# Altium PCB PCB v2.PcbDoc
Units mil, origin at the board's own origin, x right, y up, seen from the top; angles counter-clockwise.
Board outline 7677.17 x 3937.01 mil, 2 copper layers (Top Layer, Bottom Layer); 84 components, 61 nets, 277 pads, 36 vias.
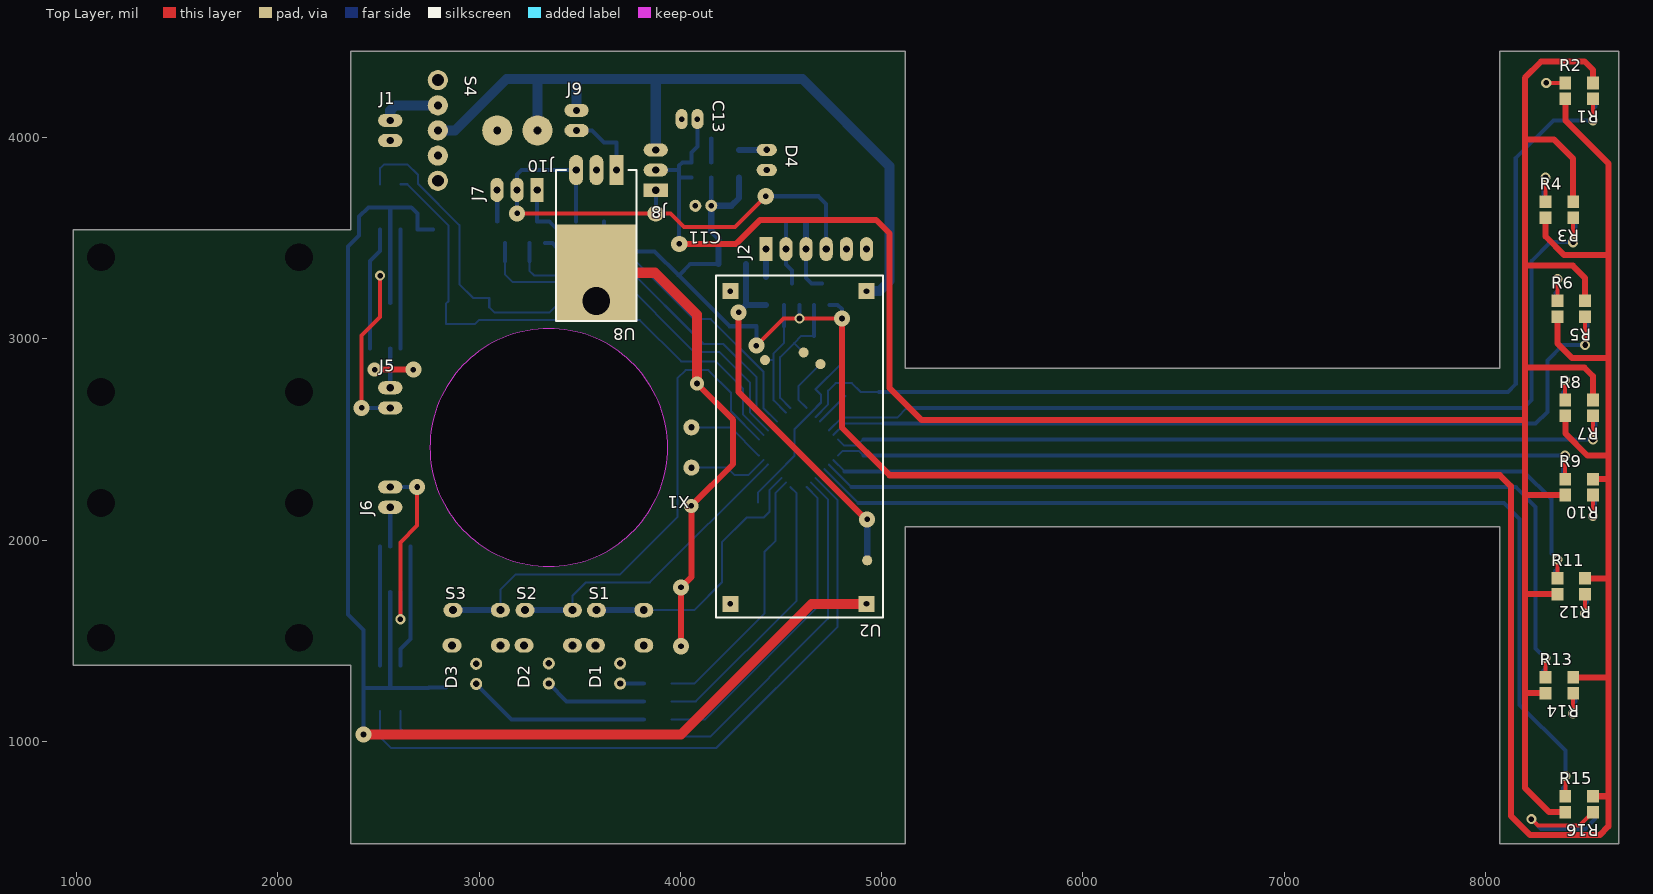
[diagram p0: Top Layer view]
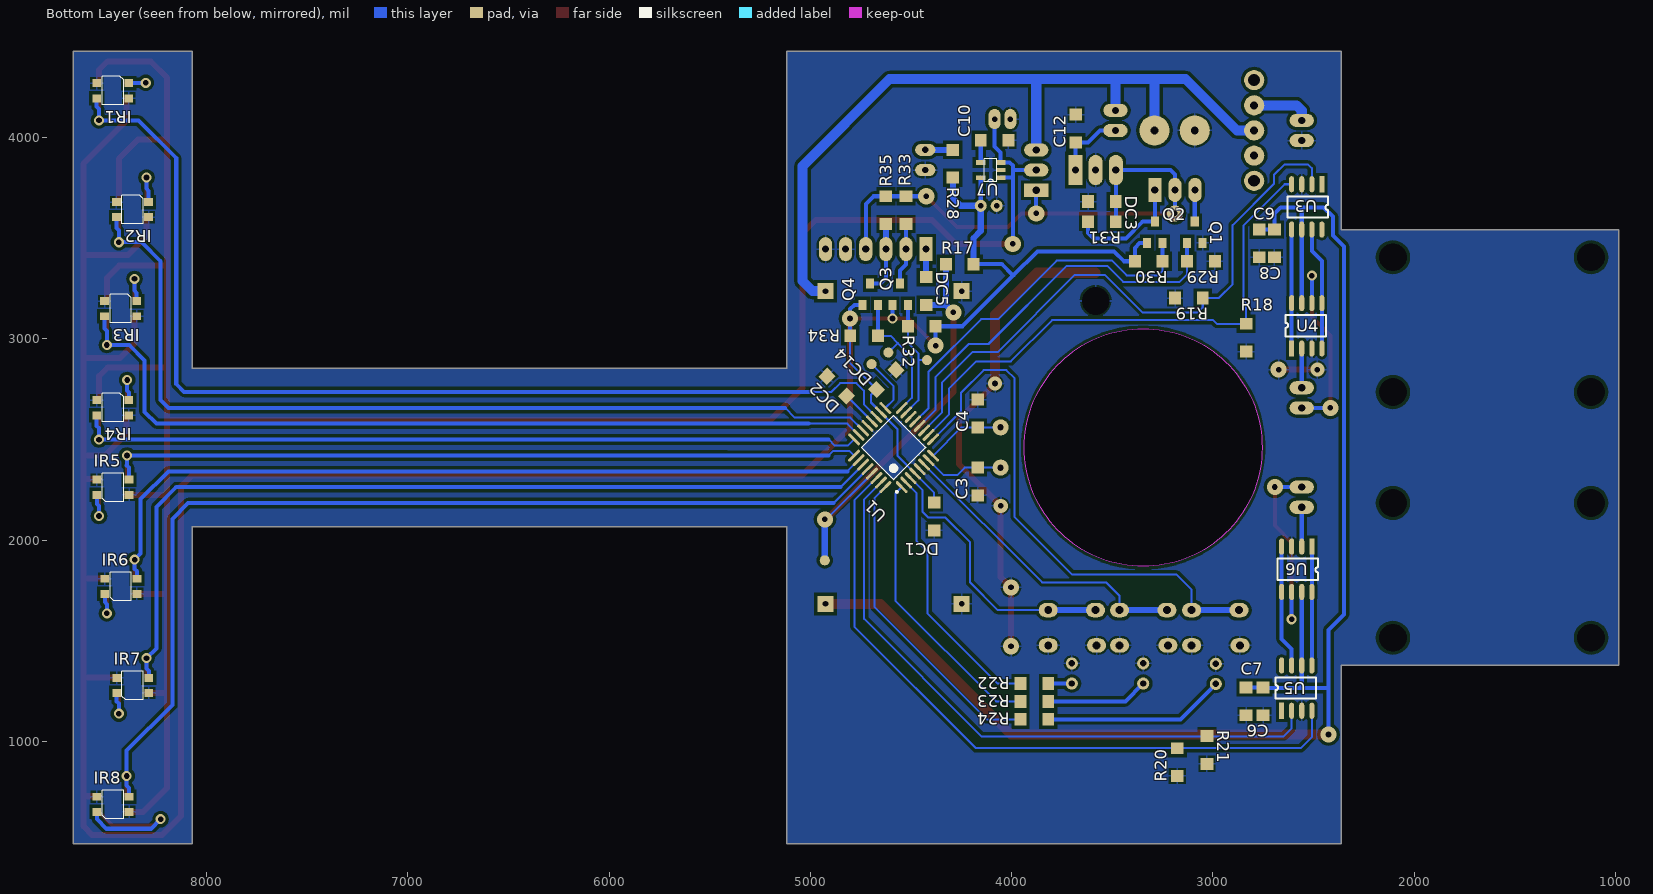
[diagram p1: Bottom Layer view, seen from below]

## Layer stack, top to bottom
Top Solder: solder mask 0.4, Solder Resist, Dk 3.5
Top Layer: signal copper 1.4
Dielectric 1: dielectric 12.6, FR-4, Dk 4.8
Bottom Layer: signal copper 1.4
Bottom Solder: solder mask 0.4, Solder Resist, Dk 3.5

## Board outline
2362.2,492.13 2362.2,1377.95 984.25,1377.95 984.25,3543.31 2362.2,3543.31 2362.2,4429.13 5118.11,4429.13 5118.11,2854.33 8070.87,2854.33 8070.87,4429.13 8661.42,4429.13 8661.42,492.13 8070.87,492.13 8070.87,2066.93 5118.11,2066.93 5118.11,492.13
cut-out: 2755.91,2460.63 ccw(c3346.46,2460.63) 3346.46,1870.08 ccw(c3346.46,2460.63) 3937.01,2460.63 ccw(c3346.46,2460.63) 3346.46,3051.18 ccw(c3346.46,2460.63)

## Design rules (kind name [scope] priority, off if disabled: settings)
Clearance [All] p1: gap=15
HoleSize [All] p1: absolutevalues=TRUE maxlimit=13779.53 minlimit=0.98 maxpercent=80.000 minpercent=20.000
PolygonConnect [All] p1: connectstyle=Relief reliefconductorwidth=10 reliefentries=4 polygonreliefangle="90 Angle" airgapwidth=10
RoutingVias [All] p1: holewidth=28 width=50 viastyle="Through Hole" minholewidth=28 minwidth=50 maxholewidth=28 maxwidth=80
SolderMaskExpansion [All] p1: expansion=4
Width [All] p1: maxlimit=50 minlimit=10 preferedwidth=20
29 further rules are at their usual default settings.

## Classes and differential pairs
component class Sensors: IR1 IR2 IR3 IR4 IR5 IR6 IR7 IR8 R1 R2 R3 R4 R5 R6 R7 R8 R9 R10 R11 R12 R13 R14 R15 R16
component class Power: C10 C11 C12 C13 D4 DC3 J1 J8 J9 R28 S4 U7 U8
component class Motors: C6 C7 C8 C9 J5 J6 J7 J10 Q1 Q2 R18 R19 R20 R21 R29 R30 R31 U2 U3 U4 U5 U6
component class Main: C3 C4 D1 D2 D3 DC1 DC2 DC5 DC14 J2 Q3 Q4 R17 R22 R23 R24 R32 R33 R34 R35 S1 S2 S3 U1 X1

## Components (designator, comment, footprint, x,y, rotation, side; value= is the part's Value field where it differs from the comment)
C3 "CAP-CER" C1206 4167.72,2291.73 r90 bottom
C4 "CAP-CER" C1206 4167.72,2629.53 r270 bottom
C6 "CAP-CER" C1206 2751.18,1199.61 r90 bottom
C7 "CAP-CER" C1206 2835.83,1199.61 r90 bottom
C8 "CAP-CER" C1206 2694.49,3474.41 r90 bottom
C9 "CAP-CER" C1206 2770.87,3474.41 r90 bottom
C10 "CAP-CER" C1206 4084.65,3987.01 r0 bottom
C11 "CAP-ELEC" CAP-ELEC-5x11x2mm#1 4114.17,3661.42 r180 top
C12 "CAP-CER" C1206 3681.1,4045.28 r90 bottom
C13 "CAP-ELEC" CAP-ELEC-5x11x2mm#2 4045.67,4092.13 r180 top
D1 "LED" LED-3MM-YELLOW 3700.79,1338.19 r90 top
D2 "LED" LED-3MM-YELLOW 3346.46,1338.19 r90 top
D3 "LED" LED-3MM-YELLOW 2985.85,1336.37 r90 top
D4 "LED" LED-3MM-RED 4429.14,3888.97 r270 top
DC1 "CAP-CER" C1206 4385.04,2118.11 r270 bottom
DC2 "CAP-CER" C1206 4868.4,2765.65 r45 bottom
DC3 "CAP-CER" C1206 3551.57,3682.28 r180 bottom
DC5 "CAP-CER" C1206 4424.61,3238.19 r90 bottom
DC14 "CAP-CER" C1206 4622.54,2797.93 r315 bottom
IR1 "QRE1113GR" QRE1113GR 8464.57,4232.28 r0 bottom
IR2 "QRE1113GR" QRE1113GR 8366.14,3641.73 r0 bottom
IR3 "QRE1113GR" QRE1113GR 8425.2,3149.61 r0 bottom
IR4 "QRE1113GR" QRE1113GR 8464.57,2657.48 r0 bottom
IR5 "QRE1113GR" QRE1113GR 8464.57,2263.78 r180 bottom
IR6 "QRE1113GR" QRE1113GR 8425.2,1771.65 r180 bottom
IR7 "QRE1113GR" QRE1113GR 8366.14,1279.53 r180 bottom
IR8 "QRE1113GR" QRE1113GR 8464.57,688.98 r180 bottom
J1 "BAT" "HEADER 1x2" 2559.06,4035.43 r0 top
J2 "UART" "Header 1x6" 4424.61,3446.06 r90 top
J5 "MOT IZQ" "HEADER 1x2" 2559.06,2707.48 r0 top
J6 "MOT DER" "HEADER 1x2" 2559.06,2213.78 r180 top
J7 "ESC SIGNAL" "Header 1x3" 3288.98,3740.16 r270 top
J8 "JUMPER" "Header 1x3" 3877.95,3738.58 r180 top
J9 "JUMPER" JUMPER 3484.25,4085.43 r180 top
J10 "ESC POWER" BLOCK_TERMINAL-2 3190.55,4035.43 r270 top
Q1 "2N7002" SOT-23 3365.55,3602.68 r180 bottom
Q2 "2N7002" SOT-23 3563.98,3602.68 r180 bottom
Q3 "2N7002" SOT-23 4829.33,3295.28 r180 bottom
Q4 "2N7002" SOT-23 4978.15,3295.28 r180 bottom
R1 "RES" R1206 8464.57,4192.91 r180 top
R2 "RES" R1206 8464.57,4271.65 r0 top
R3 "RES" R1206 8366.14,3602.36 r180 top
R4 "RES" R1206 8366.14,3681.1 r0 top
R5 "RES" R1206 8425.2,3110.24 r180 top
R6 "RES" R1206 8425.2,3188.98 r0 top
R7 "RES" R1206 8464.57,2618.11 r180 top
R8 "RES" R1206 8464.57,2696.85 r0 top
R9 "RES" R1206 8464.57,2303.15 r0 top
R10 "RES" R1206 8464.57,2224.41 r180 top
R11 "RES" R1206 8425.2,1811.02 r0 top
R12 "RES" R1206 8425.2,1732.28 r180 top
R13 "RES" R1206 8366.14,1318.9 r0 top
R14 "RES" R1206 8366.14,1240.16 r180 top
R15 "RES" R1206 8464.57,728.35 r0 top
R16 "RES" R1206 8464.57,649.61 r180 top
R17 "RES" R1206 4257.87,3371.26 r180 bottom
R18 "RES" R1206 2835.43,3006.3 r90 bottom
R19 "RES" R1206 3119.69,3203.15 r180 bottom
R20 "RES" R1206 3177.17,898.03 r90 bottom
R21 "RES" R1206 3029.92,958.27 r90 bottom
R22 "RES" R1206 3887.18,1288.19 r0 bottom
R23 "RES" R1206 3887.18,1199.21 r0 bottom
R24 "RES" R1206 3887.18,1110.63 r0 bottom
R28 "RES" R1206 4292.13,3870.08 r270 bottom
R29 "RES" R1206 3059.45,3385.83 r0 bottom
R30 "RES" R1206 3318.9,3385.83 r0 bottom
R31 "RES" R1206 3551.57,3582.68 r180 bottom
R32 "RES" R1206 4446.46,3062.99 r180 bottom
R33 "RES" R1206 4524.61,3639.76 r90 bottom
R34 "RES" R1206 4733.07,3015.35 r0 bottom
R35 "RES" R1206 4624.61,3639.76 r90 bottom
S1 "BUTTON" TACT_SWITCH-SMALL-4PIN 3818.29,1652.85 r180 top
S2 "BUTTON" TACT_SWITCH-SMALL-4PIN 3463.96,1652.85 r180 top
S3 "BUTTON" TACT_SWITCH-SMALL-4PIN 3105.85,1652.85 r180 top
S4 "SLIDE-SWITCH" SWITCH 2795.28,4035.43 r270 top
U1 "ATmega328PB-AUR" 32A_M 4586.61,2460.63 r45 bottom
U2 "XL6009 Module" "XL6009 mdl" 4586.61,2460.63 r270 top
U3 "4427" SOIC-8 2459.06,3983.31 r270 bottom
U4 "ZXMHC3F381N8" SOIC-8 2609.06,2737.76 r90 bottom
U5 "4427" SOIC-8 2659.06,937.95 r90 bottom
U6 "ZXMHC3F381N8" SOIC-8 2509.06,2183.5 r270 bottom
U7 "LP2985" SOT-23-5 4104.33,3838.58 r0 bottom
U8 "LM7805" TO-220-FLAT 3682.68,3838.58 r270 top
X1 "XTAL" HC-49/S 4055.12,2460.63 r270 top

## Footprints (in the part's own frame and the unit in brackets; to place one, negate y for a bottom-side part, rotate by r counter-clockwise, add the part's x,y. Pads: shape width x height; smd on the part's side, far side on the other; paste and mask are expansions set on the pad)
32A_M [mm] "Thin QFP, 32-Leads, Body 7x7mm, Pitch 0.8mm, IPC Low Density"
  oval 1.95x0.381 smd: 1(-4.25,2.8) 2(-4.25,2) 3(-4.25,1.2) 4(-4.25,0.4) 5(-4.25,-0.4) 6(-4.25,-1.2) 7(-4.25,-2) 8(-4.25,-2.8) 17(4.25,-2.8) 18(4.25,-2) 19(4.25,-1.2) 20(4.25,-0.4) 21(4.25,0.4) 22(4.25,1.2) 23(4.25,2) 24(4.25,2.8)
  oval 0.381x1.95 smd: 9(-2.8,-4.25) 10(-2,-4.25) 11(-1.2,-4.25) 12(-0.4,-4.25) 13(0.4,-4.25) 14(1.2,-4.25) 15(2,-4.25) 16(2.8,-4.25) 25(2.8,4.25) 26(2,4.25) 27(1.2,4.25) 28(0.4,4.25) 29(-0.4,4.25) 30(-1.2,4.25) 31(-2,4.25) 32(-2.8,4.25)
  silkscreen extent -4.37,-2.85 2.85,3.77, body extent -3.5,-3.5 3.5,3.5, height 1.2
BLOCK_TERMINAL-2 [mm]
  round 3.81 hole 1: 1(0,2.54) 2(0,-2.54)
  body extent -4.57,-5 3.43,5, height 10.16
C1206 [mm]
  rect 1.5x1.6 smd: 1(-1.75,0) 2(1.75,0)
  body extent -1.6,-0.76 1.6,0.84, height 1.26
CAP-ELEC-5x11x2mm#1 [mil]
  round 60 hole 27.56: 1(-39.37,0) 2(39.37,0)
  body extent -100,-99 99,99, height 454
CAP-ELEC-5x11x2mm#2 [mil]
  oval 60x100 hole 27.56: 1(-39.37,0) 2(39.37,0)
  body extent -100,-99 99,99, height 454
HC-49/S [mil]
  round 80 hole 31.5: 1(-100,0) 2(100,0)
  body extent -223,-90 223,93, height 138
"HEADER 1x2" [mil]
  oval 120x65 hole 35.43: 1(0,50) 2(0,-50)
  body extent -49,-100 49,100, height 336
"Header 1x3" [mil]
  rect 120x65 hole 35.43: 1(0,0)
  oval 120x65 hole 35.43: 2(0,-100) 3(0,-200)
  body extent -49,-250 49,50, height 336
"Header 1x6" [mil]
  rect 120x65 hole 35.43: 1(0,0)
  oval 120x65 hole 35.43: 2(0,-100) 3(0,-200) 4(0,-300) 5(0,-400) 6(0,-500)
  body extent -49,-550 49,50, height 336
JUMPER [mil]
  oval 120x65 hole 35.43: 1(0,50) 2(0,-50)
  body extent -49,-100 49,100, height 350
LED-3MM-RED [mil]
  oval 60x100 hole 31.5: A(-50,0) K(50,0)
  body extent -66,-65 64,65, height 217
LED-3MM-YELLOW [mil]
  round 60 hole 31.5: A(-50,0) K(50,0)
  body extent -66,-65 64,65, height 217
QRE1113GR [mm]
  rect 1.1x1 smd: A(-2.01,-0.97) C(2.04,0.94) E(-2.01,0.94) K(2.04,-0.97)
  silkscreen extent -1.35,-1.85 1.35,1.75, body extent -2.4,-1.8 2.4,1.8, height 1.83
R1206 [mm]
  rect 1.5x1.6 smd: 1(-1.75,0) 2(1.75,0)
  body extent -1.6,-0.76 1.6,0.84, height 0.68
SOIC-8 [mil]
  rect 80x25 smd: 1(215,0)
  oval 80x25 smd: 2(215,-50) 3(215,-100) 4(215,-150) 5(440,-150) 6(440,-100) 7(440,-50) 8(440,0)
  silkscreen extent 275,-170 380,30, body extent 212,-171 448,21, height 69
SOT-23 [mil]
  rect 40x50 smd: B(237.2,-125.98) C(275,-20) E(313.98,-125.98)
  body extent 218,-124 333,-27, height 38
SOT-23-5 [mm]
  rect 1.2x0.6 smd: 1(-1.25,0.95) 3(-1.25,-0.95) 4(1.25,-0.95) 5(1.25,0.95)
  rect 1.2x0.5 smd: 2(-1.25,0)
  silkscreen extent -0.8,-1.45 0.8,1.45, body extent -1.4,-1.45 1.4,1.45, height 1.45
SWITCH [mm]
  round 2.54 hole 1: 1(-3.175,0) 2(0,0) 3(3.175,0)
  round 2.54 hole 1.5: 4(-6.35,0) 4(6.35,0)
  body extent -7,-3.1 7,3.1, height 9.65
TACT_SWITCH-SMALL-4PIN [mm]
  oval 2.4x1.8 hole 1: 1(0,4.445) 1(6.096,4.445) 2(0,0) 2(5.969,0)
  body extent -0.94,-0.79 7.04,5.21, height 5.15
TO-220-FLAT [mil]
  rect 150x70 hole 35.43: 1(0,0)
  oval 150x70 hole 35.43: 2(0,-100) 3(0,-200)
  rect 480x400 smd: 2(510,-100)
  round 0 hole 137.8 unplated: 2(650,-100)
  silkscreen extent 0,-300 750,100, body extent -5,-300 755,100, height 195
"XL6009 mdl" [mil]
  rect 80x80 hole 27.56: 0(-777,338) 1(-777,-338) 2(777,-338) 3(777,338)
  silkscreen extent -855,-411 845,419, body extent -850,-415 850,415, height 502

## Part data
J1 J5 J6: library part "Header 1x2"
J2: library part "Header 1x6"
J7 J8: library part "Header 1x3"
J10: library part 2-BLOCK_TERMINAL
Q1 Q2 Q3 Q4: library part N-MOSFET
U1: "8-bit AVR Microcontroller, 32KB Flash, 1KB EEPROM, 2KB SRAM, 32-pin TQFP, Industrial Grade (-40°C to 85°C), Reel"
U8: library part LM78XX

## Free pads (board coordinates)
  round 0 hole 137.8 unplated: 0(2106.3,1515.75) 0(2106.3,2185.04) 0(2106.3,2736.22) 0(2106.3,3405.51) 1(1122.05,1515.75) 1(1122.05,2185.04) 1(1122.05,2736.22) 1(1122.05,3405.51)
  round 50 all layers, no hole: ""(4420.47,2894.88) ""(4612.6,2932.68) ""(4695.67,2874.8) ""(4928.35,1900)

## Via types
v1: diameter 50, hole 28, Top Layer to Bottom Layer, 19 vias
v2: diameter 80, hole 28, Top Layer to Bottom Layer, 14 vias
v3: diameter 70, hole 28, Top Layer to Bottom Layer, 3 vias

## Nets (pads, with @x,y where several pads share a name; then routed paths per layer and width w, separated by ;. In a path a pad name is that pad's centre, name@x,y a point inside that pad or via, vN(x,y) a via of type N, cw(c..) or ccw(c..) an arc to the next point about the centre after c; other vN are vias at no path point)
5V: DC3.2 J2.4 J7.2 J8.1 R31.2 R33.2 R35.2 U8.3 | length 2732.9
  Top Layer w20: v2(3188.98,3623.62) v2(3877.95,3623.62) 3950,3623.62 4017.32,3556.3 4271.65,3556.3 v2(4424.02,3708.66)
  Bottom Layer w20: v2(3188.98,3623.62) J7.2 3188.98,3816.54 3211.02,3838.58 U8.3 DC3.2 R31.2 ; v2(3877.95,3623.62) J8.1 ; v2(4424.02,3708.66) R33.2 R35.2 4685.43,3708.66 4724.61,3669.48 J2.4
BAT: J8.3 J9.2 J10.1 S4.2 U2.0 | length 4000.3
  Bottom Layer w50: S4.2 2880.71,4035.43 3136.61,4291.34 3290.55,4291.34 ; J10.1 3290.55,4291.34 ; J9.2 3484.25,4291.34 ; J8.3 3877.95,4291.34 ; U2.0 4989.6,3237.63 5039.37,3287.4 5039.37,3858.27 4606.3,4291.34 3877.95,4291.34 ; 3290.55,4291.34 3484.25,4291.34 ; 3484.25,4291.34 3877.95,4291.34
BTN1: S1.2 U1.3 | length 1370.1
  Bottom Layer w10: S1.2@3818.29,1652.85 4068.6,1652.85 4205.91,1790.16 4205.91,1989.76 4329.13,2112.99 4413.39,2112.99 4443.31,2142.91 4443.31,2250.51 U1.3
  Bottom Layer w30: S1.2@3583.29,1652.85 S1.2@3818.29,1652.85
BTN2: S2.2 U1.6 | length 1546.5
  Bottom Layer w10: S2.2@3463.96,1652.85 3463.96,1723.01 3531.5,1790.55 3848.49,1790.55 4433.66,2375.72 U1.6
  Bottom Layer w30: S2.2@3228.96,1652.85 S2.2@3463.96,1652.85
BTN3: S3.2 U1.9 | length 2673.4
  Bottom Layer w10: S3.2@3105.85,1652.85 3105.85,1754.27 3182.28,1830.71 3701.18,1830.71 3985.43,2114.96 3985.43,2804.33 4025.98,2844.88 4139.37,2844.88 4251.57,2732.68 4251.57,2639.77 U1.9
  Bottom Layer w30: S3.2@2870.85,1652.85 S3.2@3105.85,1652.85
E_ON: Q1.B R29.2 U1.12 | length 1959.4
  Bottom Layer w10: R29.2 3128.35,3320.47 3165.75,3283.07 3445.67,3283.07 3525.98,3363.39 3726.38,3363.39 4114.96,2974.8 4214.17,2974.8 4377.56,2811.42 4377.56,2647.41 U1.12
  Bottom Layer w20: R29.2 Q1.B
E_PWM: Q2.E R30.1 U1.13 | length 1842.5
  Bottom Layer w10: R30.1 3250,3339.37 3273.23,3316.14 3429.13,3316.14 3501.38,3388.39 3776.57,3388.39 4066.93,3098.03 4151.57,3098.03 4412.99,2836.61 4412.99,2656.52 U1.13
  Bottom Layer w20: R30.1 Q2.E
GND: C3.1 C4.1 C6.1 C7.1 C8.1 C9.1 C10.1 C11.2 C12.2 C13.2 D1.K D2.K D3.K D4.K DC1.2 DC2.2 DC3.1 DC14.1 IR1.E IR1.K IR2.E IR2.K IR3.E IR3.K IR4.E IR4.K IR5.E IR5.K IR6.E IR6.K IR7.E IR7.K IR8.E IR8.K J1.2 J2.5 J2.6 J10.2 Q1.E R18.1 R19.1 R20.1 R21.1 R29.1 S1.1 S2.1 S3.1 U1.5 U1.21 U2.1 U2.2 U3.3 U4.3 U5.3 U6.3 U7.2 U8.2 | length 2612.1
  Top Layer w30: v3(2481.5,2847.64) v2(2674.02,2847.64) ; v2(4003.15,1473.62) 4003.15,1754.72 4008.66,1760.24 v2(4003.15,1765.75) 4054.33,1816.93 v3(4054.33,2170.47) 4262.6,2378.74 4262.6,2598.43 v3(4082.68,2778.35)
  Top Layer w50: U8.2@3582.68,3328.58 3874.57,3328.58 4082.68,3120.47 v3(4082.68,2778.35)
IR1: IR1.C R1.1 U1.19 | length 5427.7
  Top Layer w20: v1(8533.46,4085.43) R1.1
  Bottom Layer w10: U1.19 4734.41,2675.24 4734.41,2743.47 4771.02,2780.08 4851.91,2780.08 4895.77,2736.22 4986.61,2736.22
  Bottom Layer w20: 4986.61,2736.22 8110.24,2736.22 8149.61,2775.59 8149.61,3897.64 8337.4,4085.43 v1(8533.46,4085.43) 8533.46,4142.13 8544.88,4153.54 IR1.C
IR2: IR2.C R3.1 U1.22 | length 4738.7
  Top Layer w20: v1(8435.04,3480.32) R3.1
  Bottom Layer w10: U1.22 4801.54,2608.74 5076.46,2608.74 5125.2,2657.48
  Bottom Layer w20: 5125.2,2657.48 8188.98,2657.48 8228.35,2696.85 8228.35,3385.83 8322.83,3480.32 v1(8435.04,3480.32) 8435.04,3538.58 8446.46,3550 IR2.C
IR3: IR3.C R5.1 U1.23 | length 4356.5
  Top Layer w20: v1(8494.09,2969.68) R5.1
  Bottom Layer w10: U1.23 4816.08,2578.74 5007.87,2578.74
  Bottom Layer w20: 5007.87,2578.74 8248.03,2578.74 8307.09,2637.8 8307.09,2893.7 8383.07,2969.68 v1(8494.09,2969.68) 8494.09,3039.37 8505.51,3050.79 IR3.C
IR4: IR4.C R7.1 U1.24 | length 4019.9
  Top Layer w20: v1(8533.46,2500) R7.1
  Bottom Layer w10: U1.24 4813.8,2470.08 4878.35,2470.08 4909.26,2501 ; 5412.39,2501 5413.39,2500
  Bottom Layer w20: 4909.26,2501 5412.39,2501 ; 5413.39,2500 v1(8533.46,2500) 8533.46,2556.69 8544.88,2568.11 IR4.C
IR5: IR5.C R9.1 U1.25 | length 3880.4
  Top Layer w20: v1(8394.09,2421.26) 8394.09,2321.26 8385.83,2312.99 R9.1
  Bottom Layer w10: U1.25 4806.71,2444.09 4886.22,2444.09 4910.05,2420.26 ; 5412.39,2420.26 5413.39,2421.26
  Bottom Layer w20: 4910.05,2420.26 5412.39,2420.26 ; 5413.39,2421.26 v1(8394.09,2421.26) 8394.09,2374.41 ; IR5.C 8384.25,2360.63 8396.06,2372.44
IR6: IR6.C R11.1 U1.26 | length 4152.2
  Top Layer w20: R11.1 v1(8356.3,1903.94)
  Bottom Layer w10: U1.26 4816.08,2342.52
  Bottom Layer w20: 4816.08,2342.52 8188.98,2342.52 8326.77,2204.72 8326.77,1933.46 v1(8356.3,1903.94) 8356.3,1857.48 8344.88,1846.06 IR6.C
IR7: IR7.C R13.1 U1.27 | length 4566
  Top Layer w20: R13.1 v1(8297.24,1414.17)
  Bottom Layer w10: U1.27 4850.28,2263.78
  Bottom Layer w20: 4850.28,2263.78 8149.61,2263.78 8248.03,2165.35 8248.03,1463.39 v1(8297.24,1414.17) 8297.24,1362.6 8285.83,1351.18 IR7.C
IR8: IR8.C R15.1 U1.28 | length 5134.8
  Top Layer w20: R15.1 v1(8395.67,828.74)
  Bottom Layer w10: U1.28 4884.48,2185.04
  Bottom Layer w20: 4884.48,2185.04 8090.55,2185.04 8169.29,2106.3 8169.29,1181.1 8395.67,954.72 v1(8395.67,828.74) 8395.67,780.71 8384.25,769.29 IR8.C
LED1: R22.2 U1.2 | length 1299.5
  Bottom Layer w10: R22.2 4068.5,1288.19 4418.5,1638.19 4418.5,1944.09 4472.83,1998.43 4472.83,2235.49 U1.2
LED2: R23.2 U1.1 | length 1406.4
  Bottom Layer w10: R23.2 4077.56,1199.21 4577.17,1698.82 4577.17,2233.45 U1.1
LED3: R24.2 U1.32 | length 1575
  Bottom Layer w10: R24.2 4123.23,1110.63 4681.89,1669.29 4681.89,2209.46 U1.32
MD_DIR: R20.2 U1.30 U5.4 | length 3459.5
  Bottom Layer w10: U5.4 2509.06,1022.44 2564.57,966.93 R20.2 4177.17,966.93 4781.5,1571.26 4781.5,2198.93 U1.30
MD_PWM: R21.2 U1.31 U5.2 | length 3180.5
  Bottom Layer w10: U5.2 2609.06,1066.54 2649.21,1026.38 4150,1026.38 4733.07,1609.45 4733.07,2202.82 U1.31
MI_DIR: R19.2 U1.11 U3.2 | length 3028.7
  Bottom Layer w10: U3.2 2509.06,3848.03 2528.35,3867.32 2644.49,3867.32 2696.85,3814.96 2696.85,3770.47 2902.36,3564.96 2902.36,3271.26 2970.47,3203.15 R19.2 3050.79,3157.09 3077.56,3130.32 3349.61,3130.32 3537.01,3317.72 3687.01,3317.72 4070.08,2934.65 4194.88,2934.65 4345.67,2783.86 4345.67,2634.76 U1.11
MI_PWM: R18.2 U1.10 U3.4 | length 2713.6
  Bottom Layer w10: U3.4 2643.5,3768.31 2847.24,3564.57 2847.24,3185.83 2835.43,3174.02 R18.2 2981.1,3075.2 2999.61,3093.7 3798.82,3093.7 4003.54,2888.98 4175.98,2888.98 4311.02,2753.94 4311.02,2624.87 U1.10
NetC10_2: C10.2 U7.4 | length 120.1
  Bottom Layer w20: U7.4 C10.2@4153.54,3996.06
NetC12_1: C12.1 J9.1 U8.1 | length 359.8
  Bottom Layer w20: J9.1 3560.63,4035.43 3619.68,3976.38 C12.1 3682.68,3974.8 U8.1
NetD1_A: D1.A R22.1 | length 117.5
  Bottom Layer w20: D1.A R22.1
NetD2_A: D2.A R23.1 | length 508.7
  Bottom Layer w20: D2.A 3435.43,1199.21 R23.1
NetD3_A: D3.A R24.1 | length 905.2
  Bottom Layer w20: D3.A 3161.58,1110.63 R24.1
NetD4_A: D4.A R28.1 | length 137
  Bottom Layer w30: R28.1 D4.A
NetDC2_1: DC2.1 U1.20 | length 178.7
  Bottom Layer w10: U1.20 DC2.1@4820.16,2716.45
NetDC5_2: DC5.2 J2.1 | length 139
  Bottom Layer w30: DC5.2 J2.1
NetIR1_A: IR1.A R2.1 | length 178.9
  Top Layer w20: v1(8301.18,4272.05) 8395.28,4272.05 R2.1
  Bottom Layer w20: v1(8301.18,4272.05) IR1.A@8385.43,4272.05
NetIR2_A: IR2.A R4.1 | length 246.4
  Top Layer w20: R4.1 v1(8297.24,3801.57)
  Bottom Layer w20: IR2.A 8287.01,3735.83 8297.24,3746.06 v1(8297.24,3801.57)
NetIR3_A: IR3.A R6.1 | length 225
  Top Layer w20: R6.1 8357.09,3189.76 v1(8357.09,3298.43)
  Bottom Layer w20: IR3.A 8346.06,3228.35 8357.09,3239.37 v1(8357.09,3298.43)
NetIR4_A: IR4.A R8.1 | length 204.5
  Top Layer w20: v1(8393.31,2796.06) 8393.31,2700.79 8396.46,2697.64 R8.1
  Bottom Layer w20: IR4.A 8385.43,2735.04 8393.31,2742.91 v1(8393.31,2796.06)
NetIR5_A: IR5.A R10.1 | length 213.3
  Top Layer w20: v1(8533.46,2120.47) R10.1
  Bottom Layer w20: v1(8533.46,2120.47) 8533.46,2170.87 8543.7,2181.1 IR5.A
NetIR6_A: IR6.A R12.1 | length 196.8
  Top Layer w20: v1(8494.09,1636.61) R12.1
  Bottom Layer w20: v1(8494.09,1636.61) 8494.09,1681.89 8504.33,1692.13 IR6.A
NetIR7_A: IR7.A R14.1 | length 208.6
  Top Layer w20: v1(8435.04,1138.58) R14.1
  Bottom Layer w20: v1(8435.04,1138.58) 8435.04,1189.76 8445.28,1200 IR7.A
NetIR8_A: IR8.A R16.1 | length 739.2
  Top Layer w20: v1(8227.17,614.57) 8259.06,582.68 8466.54,582.68 R16.1
  Bottom Layer w20: v1(8227.17,614.57) 8274.8,566.93 8495.67,566.93 8543.7,614.96 IR8.A
NetJ1_1: J1.1 S4.1 | length 296.1
  Bottom Layer w50: J1.1 2559.06,4134.65 2584.84,4160.43 S4.1
NetJ5_1: J5.1 U4.2 | length 195.3
  Bottom Layer w20: J5.1 U4.2
NetJ5_2: J5.2 U4.6 | length 973.4
  Top Layer w20: v2(2416.93,2657.48) 2416.93,3016.14 2509.06,3108.27 v1(2509.06,3314.17)
  Bottom Layer w20: v2(2416.93,2657.48) J5.2 ; U4.6 v1(2509.06,3314.17)
NetJ6_1: J6.1 U6.2 | length 195.3
  Bottom Layer w20: U6.2 J6.1
NetJ6_2: J6.2 U6.6 | length 960.9
  Top Layer w20: v1(2609.06,1607.48) 2609.06,1989.37 2692.52,2072.83 v2(2692.52,2264.17)
  Bottom Layer w20: J6.2 2692.13,2263.78 v2(2692.52,2264.17) ; v1(2609.06,1607.48) U6.6
NetJ7_1: J7.1 Q2.C R31.1 | length 591
  Bottom Layer w20: J7.1 Q2.C 3348.82,3582.68 3431.89,3499.61 3594.09,3499.61 3620.47,3525.98 R31.1
NetJ7_3: J7.3 Q1.C | length 158.1
  Bottom Layer w20: J7.3 3090.55,3738.58 Q1.C
NetU3_5: U3.5 U4.1 U4.8 | length 590.6
  Bottom Layer w20: U4.1 U4.8 U3.5
NetU3_7: U3.7 U4.4 U4.5 | length 611.3
  Bottom Layer w20: U4.4 U4.5 2459.06,3387.01 2509.06,3437.01 U3.7
NetU5_5: U5.5 U6.1 U6.8 | length 590.6
  Bottom Layer w20: U5.5 U6.8 U6.1
NetU5_7: U5.7 U6.4 U6.5 | length 611.3
  Bottom Layer w20: U5.7 2609.06,1459.84 2659.06,1509.84 U6.5 U6.4
RST: DC5.1 pad.@4928.35,1900 R17.1 U1.29 | length 2181.1
  Top Layer w10: 4424.61,2600.36 4424.8,2600.55
  Top Layer w30: v2(4289.37,3131.89) 4289.37,2735.98 4424.8,2600.55 ; 4424.61,2600.36 4921.43,2103.54 v2(4927.56,2103.54)
  Bottom Layer w10: U1.29 4921.43,2103.54 v2(4927.56,2103.54)
  Bottom Layer w30: v2(4289.37,3131.89) 4326.77,3169.29 ; R17.1 4326.77,3169.29 ; DC5.1 4326.77,3169.29 ; v2(4927.56,2103.54) 4928.35,2102.76 pad.@4928.35,1900
RXD1: pad.@4612.6,2932.68 Q4.E R34.1 U1.16 | length 706.1
  Bottom Layer w10: U1.16 4495.67,2707.47 4495.67,2909.45 4565.75,2979.53 ; pad.@4612.6,2932.68 4565.75,2979.53 ; R34.1 4601.57,3015.35 4565.75,2979.53
  Bottom Layer w20: R34.1 Q4.E
SCK0: pad.@4695.67,2874.8 U1.17 | length 280.2
  Bottom Layer w10: U1.17 4586.61,2697.26 4586.61,2765.75 4695.67,2874.8 pad.@4696.06,2874.8
TXD1: pad.@4420.47,2894.88 Q3.E R32.1 U1.15 | length 624.3
  Bottom Layer w10: pad.@4420.47,2894.88 4463.78,2894.88 ; R32.1 4515.35,2980.31 4463.78,2928.74 4463.78,2894.88 ; U1.15 4463.78,2694.82 4463.78,2894.88
  Bottom Layer w20: R32.1 Q3.E
U_RX: J2.2 Q3.C R33.1 | length 307.9
  Bottom Layer w20: R33.1 J2.2 4524.61,3369.48 4554.33,3339.76 Q3.C
U_TX: J2.3 Q4.C R35.1 | length 358.4
  Bottom Layer w20: J2.3 4624.61,3302.16 4651.5,3275.28 Q4.C
  Bottom Layer w30: J2.3 R35.1
VCC: C11.1 DC1.1 DC14.2 Q2.B Q3.B Q4.B R1.2 R3.2 R5.2 R7.2 R9.2 R11.2 R13.2 R15.2 R17.2 R28.2 R30.2 R32.2 R34.2 U1.4 U1.18 U7.5 | length 15612.6
  Top Layer w20: v2(4377.56,2966.93) 4511.81,3101.18 v1(4592.13,3101.18) v2(4803.15,3101.18)
  Top Layer w30: v2(4803.15,3101.18) 4803.15,2559.06 5039.37,2322.83 8070.87,2322.83 8125.2,2268.5 8125.2,631.1 8220.87,535.43 8566.93,535.43 8609.84,578.35 8609.84,728.35 ; R3.2 8297.24,3509.45 8390.16,3416.54 8609.84,3416.54 ; R5.2 8356.3,2977.56 8427.95,2905.91 8609.84,2905.91 ; R7.2 8395.67,2530.71 8505.91,2420.47 8609.84,2420.47 ; R1.2 8395.67,4086.22 8609.84,3872.05 8609.84,3416.54 ; R13.2 8609.84,1318.9 ; R11.2 8609.84,1811.02 ; R15.2 8609.84,728.35 ; R9.2 8609.84,2303.15 ; 8609.84,728.35 8609.84,1318.9 ; 8609.84,1318.9 8609.84,1811.02 ; 8609.84,1811.02 8609.84,2303.15 ; 8609.84,2303.15 8609.84,2420.47 ; 8609.84,2420.47 8609.84,2905.91 ; 8609.84,2905.91 8609.84,3416.54
  Bottom Layer w10: DC1.1 4385.04,2236.78 U1.4 4566.93,2418.67 4566.93,2552.3 U1.18 4698.82,2684.19 4698.82,2721.65 DC14.2 4801.97,2879.92 R34.2
  Bottom Layer w20: Q2.B 3363.86,3476.69 3387.8,3452.76 R30.2 3441.73,3385.83 3490.55,3434.65 3871.65,3434.65 3992.13,3314.17 ; C11.1 U7.5 ; R17.2 4049.21,3371.26 3992.13,3314.17 ; v2(4377.56,2966.93) R32.2 4243.31,3062.99 3992.13,3314.17 ; v1(4592.13,3101.18) Q3.B ; Q4.B 4740.55,3168.9 4780.71,3168.9 4801.97,3147.64 R34.2
  Bottom Layer w30: R17.2 4188.98,3501.18 4153.54,3536.61 C11.1 4253.54,3661.42 4292.13,3700 R28.2
VHI: C6.2 C7.2 C8.2 C9.2 U2.3 U3.6 U4.7 U5.6 U6.7 | length 7235.3
  Top Layer w50: v2(2425.98,1035.04) 4003.15,1035.04 4651.74,1683.63 U2.3
  Bottom Layer w20: v2(2425.98,1035.04) 2425.98,1266.54 ; U6.7 U5.6 2559.06,1266.54 ; U4.7 U3.6 2559.06,3653.54 ; C9.2 C8.2 2694.49,3622.44 2663.39,3653.54 2559.06,3653.54 ; C7.2 C6.2 2749.21,1266.54 2559.06,1266.54 ; 2425.98,1266.54 2559.06,1266.54 ; 2425.98,1266.54 2425.98,1554.72 2349.61,1631.1 2349.61,3459.06 2403.54,3512.99 2403.54,3607.09 2450,3653.54 2559.06,3653.54
VIR: C13.1 J8.2 R2.2 R4.2 R6.2 R8.2 R10.2 R12.2 R14.2 R16.2 U7.1 U7.3 | length 12074.7
  Top Layer w30: v2(3994.49,3472.05) 4277.56,3472.05 4396.46,3590.94 4972.05,3590.94 5039.37,3523.62 5039.37,2755.91 5196.85,2598.43 8194.88,2598.43 ; R14.2 8194.88,1240.16 ; R12.2 8194.88,1732.28 ; R16.2 8315.35,649.61 8194.88,770.08 8194.88,1240.16 ; R10.2 8194.88,2224.41 ; R4.2 8435.04,3895.67 8339.37,3991.34 8194.88,3991.34 ; R6.2 8494.09,3302.36 8432.68,3363.78 8194.88,3363.78 ; R8.2 8533.46,2814.96 8490.55,2857.87 8194.88,2857.87 ; R2.2 8533.46,4336.22 8491.73,4377.95 8275.98,4377.95 8194.88,4296.85 8194.88,3991.34 ; 8194.88,1240.16 8194.88,1732.28 ; 8194.88,1732.28 8194.88,2224.41 ; 8194.88,2224.41 8194.88,2598.43 ; 8194.88,2598.43 8194.88,2857.87 ; 8194.88,2857.87 8194.88,3363.78 ; 8194.88,3363.78 8194.88,3991.34
  Bottom Layer w20: J8.2 3994.49,3838.58 ; v2(3994.49,3472.05) 3994.49,3801.18 ; U7.1 3994.49,3801.18 ; C13.1 4085.04,3956.69 4055.12,3926.77 U7.3 4009.84,3875.98 3994.49,3860.63 3994.49,3838.58 ; 3994.49,3801.18 3994.49,3838.58
XTAL1: C3.2 U1.7 X1.2 | length 404
  Bottom Layer w10: X1.2 C3.2 4233.07,2360.63 4270.47,2323.23 4337.86,2323.23 U1.7
XTAL2: C4.2 U1.8 X1.1 | length 393.4
  Bottom Layer w10: X1.1 C4.2 4249.98,2560.63 U1.8
pads on no net: S4.3 S4.4 U1.14 U3.1 U3.8 U5.1 U5.8

## Polygon pours and split planes (outlines as drawn)
GND on Bottom Layer "GND_PLANE" (solid, remove dead copper, pour order 0): 2362.2,492.13 2362.2,1377.95 984.25,1377.95 984.25,3543.31 2362.2,3543.31 2362.2,4429.13 5118.11,4429.13 5118.11,2854.33 8070.87,2854.33 8070.87,4429.13 8661.42,4429.13 8661.42,492.13 8070.87,492.13 8070.87,2066.93 5118.11,2066.93 5118.11,492.13

## Silkscreen, mask and mechanical layers (free items; w line width, h text height)
Mechanical 1:
  circle w10: c3346.46,2460.63 r590.55
  circle w5: c984.25,1377.95 r2.5
  lines w10: 984.25,1377.95 2362.2,1377.95 2362.2,492.13 5118.11,492.13 5118.11,2066.93 8070.87,2066.93 8070.87,492.13 8661.42,492.13 8661.42,4429.13 8070.87,4429.13 8070.87,2854.33 5118.11,2854.33 5118.11,4429.13 2362.2,4429.13 2362.2,3543.31 984.25,3543.31 984.25,1377.95
Mechanical 2:
  lines w10: 984.25,2460.63 2362.2,2460.63 3346.46,2460.63 ; 2362.2,1377.95 2362.2,3543.31
Mechanical 3:
  lines w10: 8361.23,1280.39 ccw(c1673.23,2460.63) 8361.23,3640.86
Mechanical 15:
  lines w10: 6062.99,2066.93 8661.42,2066.93 ; 6062.99,2460.63 8661.42,2460.63 ; 6062.99,2854.33 8661.42,2854.33 ; 6259.84,2312.99 6259.84,2460.63 6259.84,2608.27 ; 7480.31,1082.68 8661.42,1082.68 ; 7480.31,1555.12 7480.31,3366.14 ; 7480.31,3838.58 8661.42,3838.58 ; 7874.02,1082.68 7874.02,3838.58 ; 8070.87,492.13 8070.87,4429.13 ; 8464.57,1082.68 8464.57,3838.58